# Altium PCB SoilMoistureSensor.PcbDoc
Units mm, origin at the board's own origin, x right, y up, seen from the top; angles counter-clockwise.
Board outline 58 x 58 mm, 2 copper layers (Top Layer, Bottom Layer); 32 components, 26 nets, 143 pads, 25 vias.
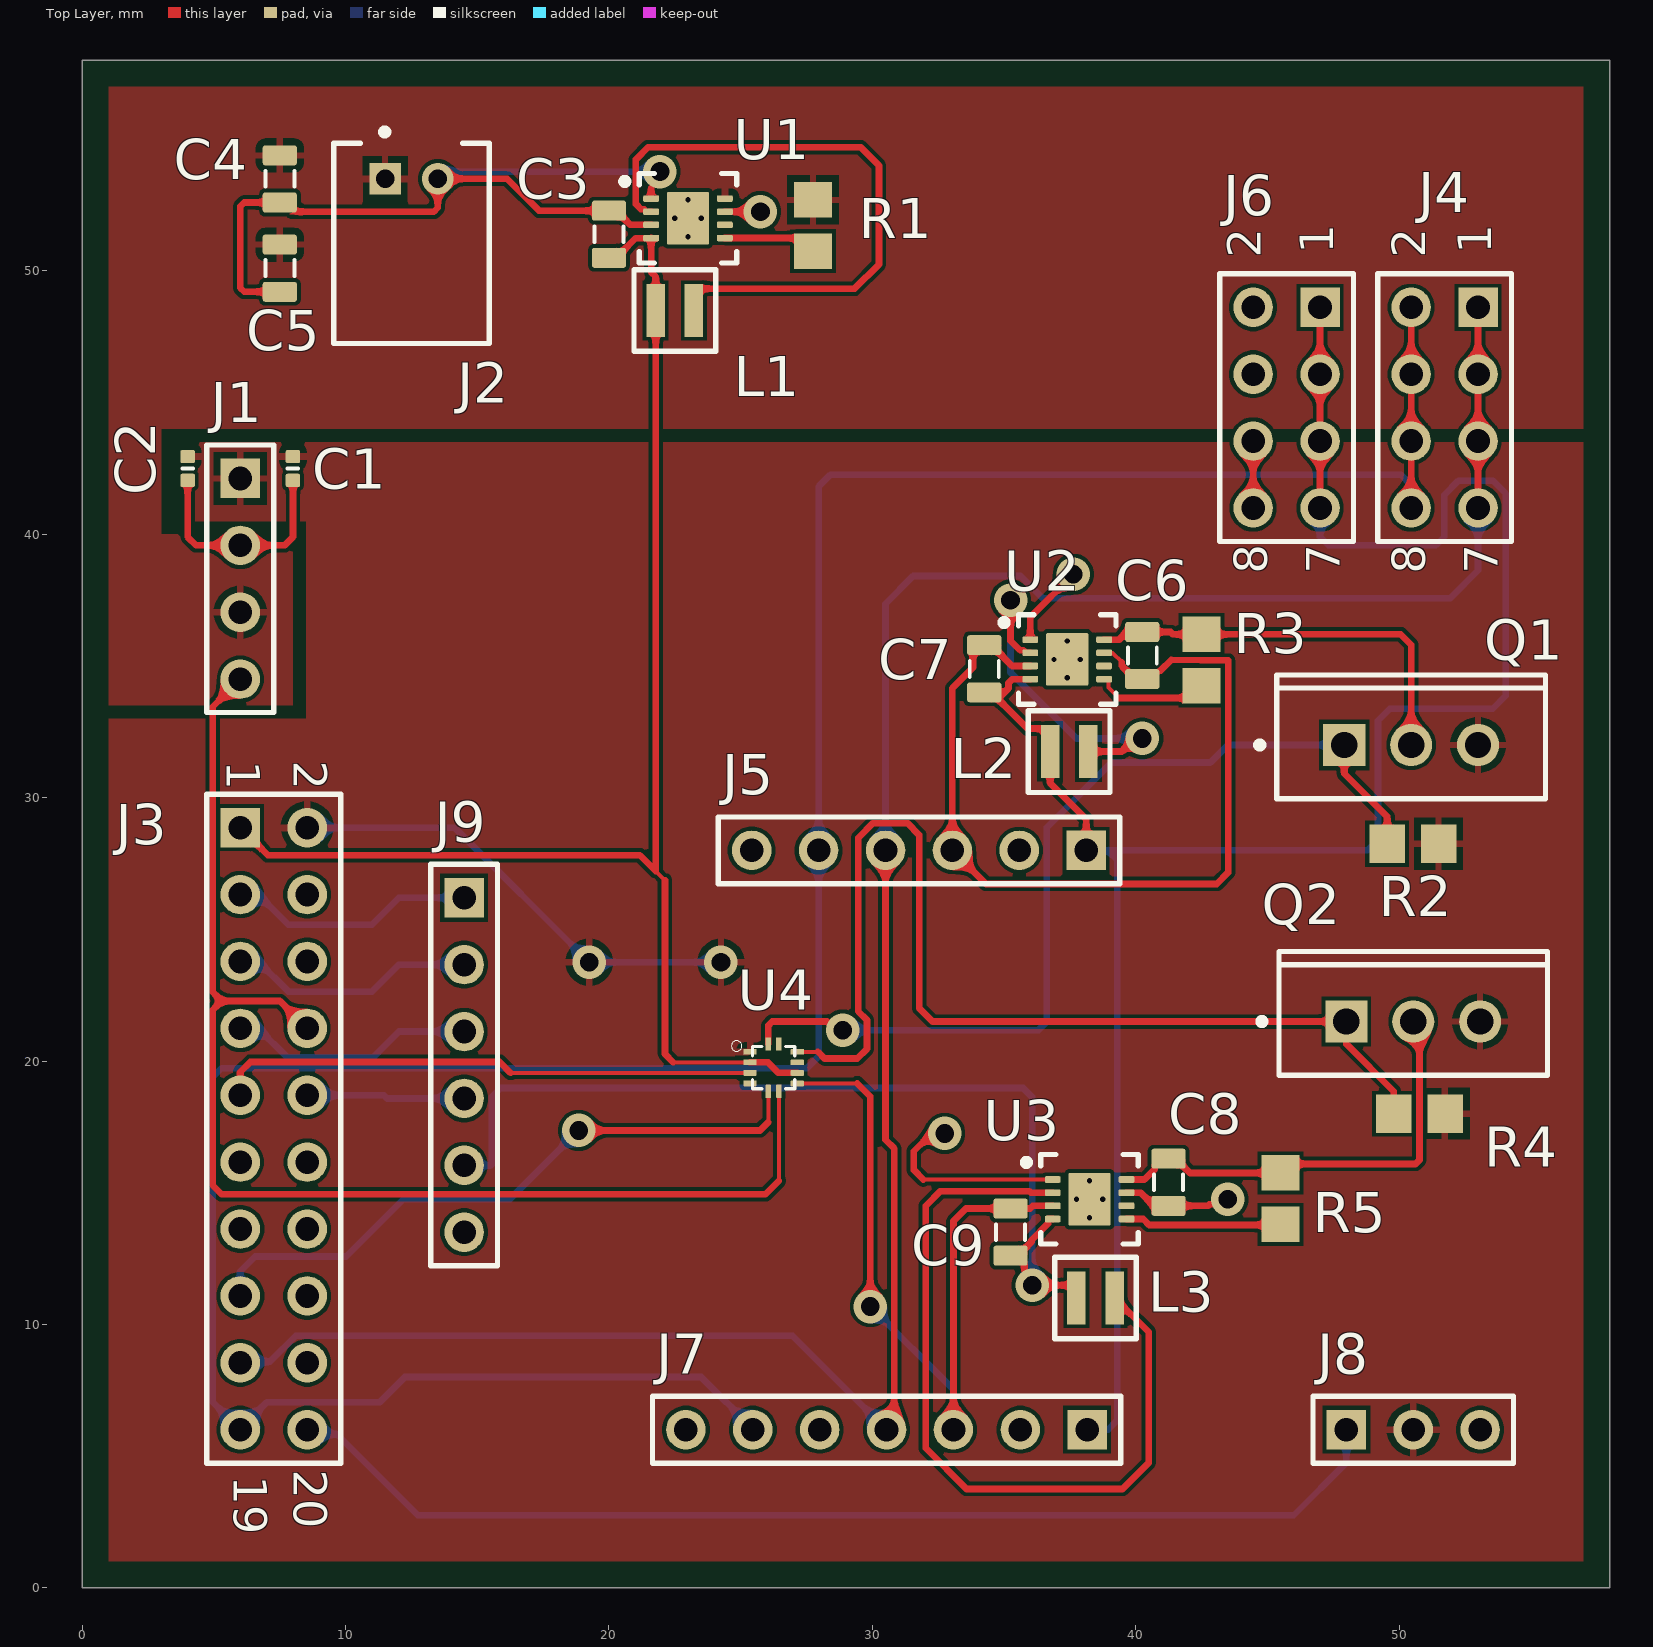
[diagram p0: Top Layer view]
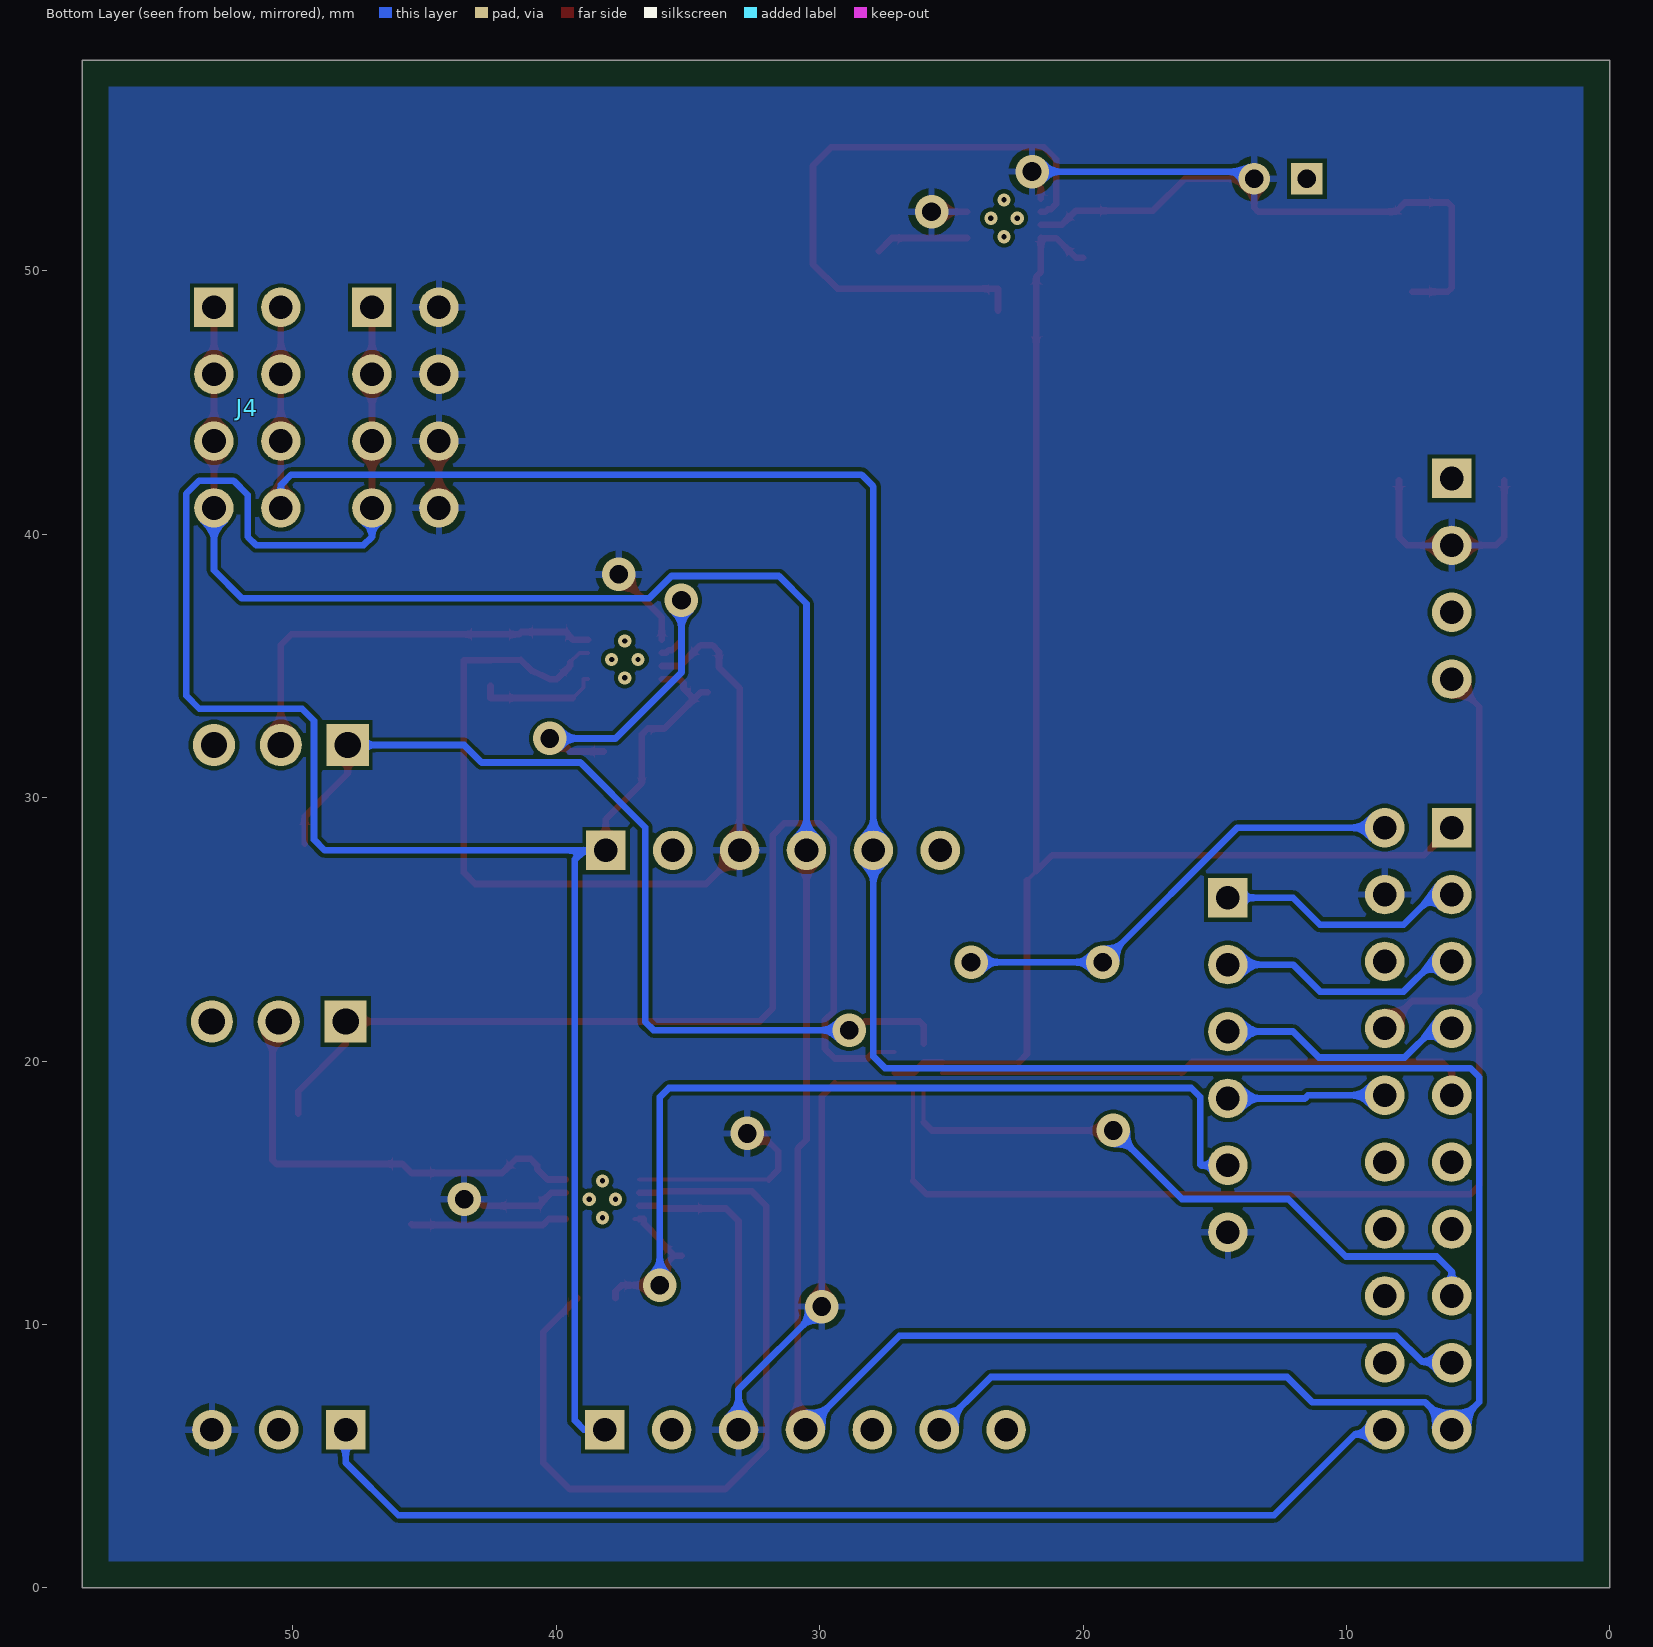
[diagram p1: Bottom Layer view, seen from below]
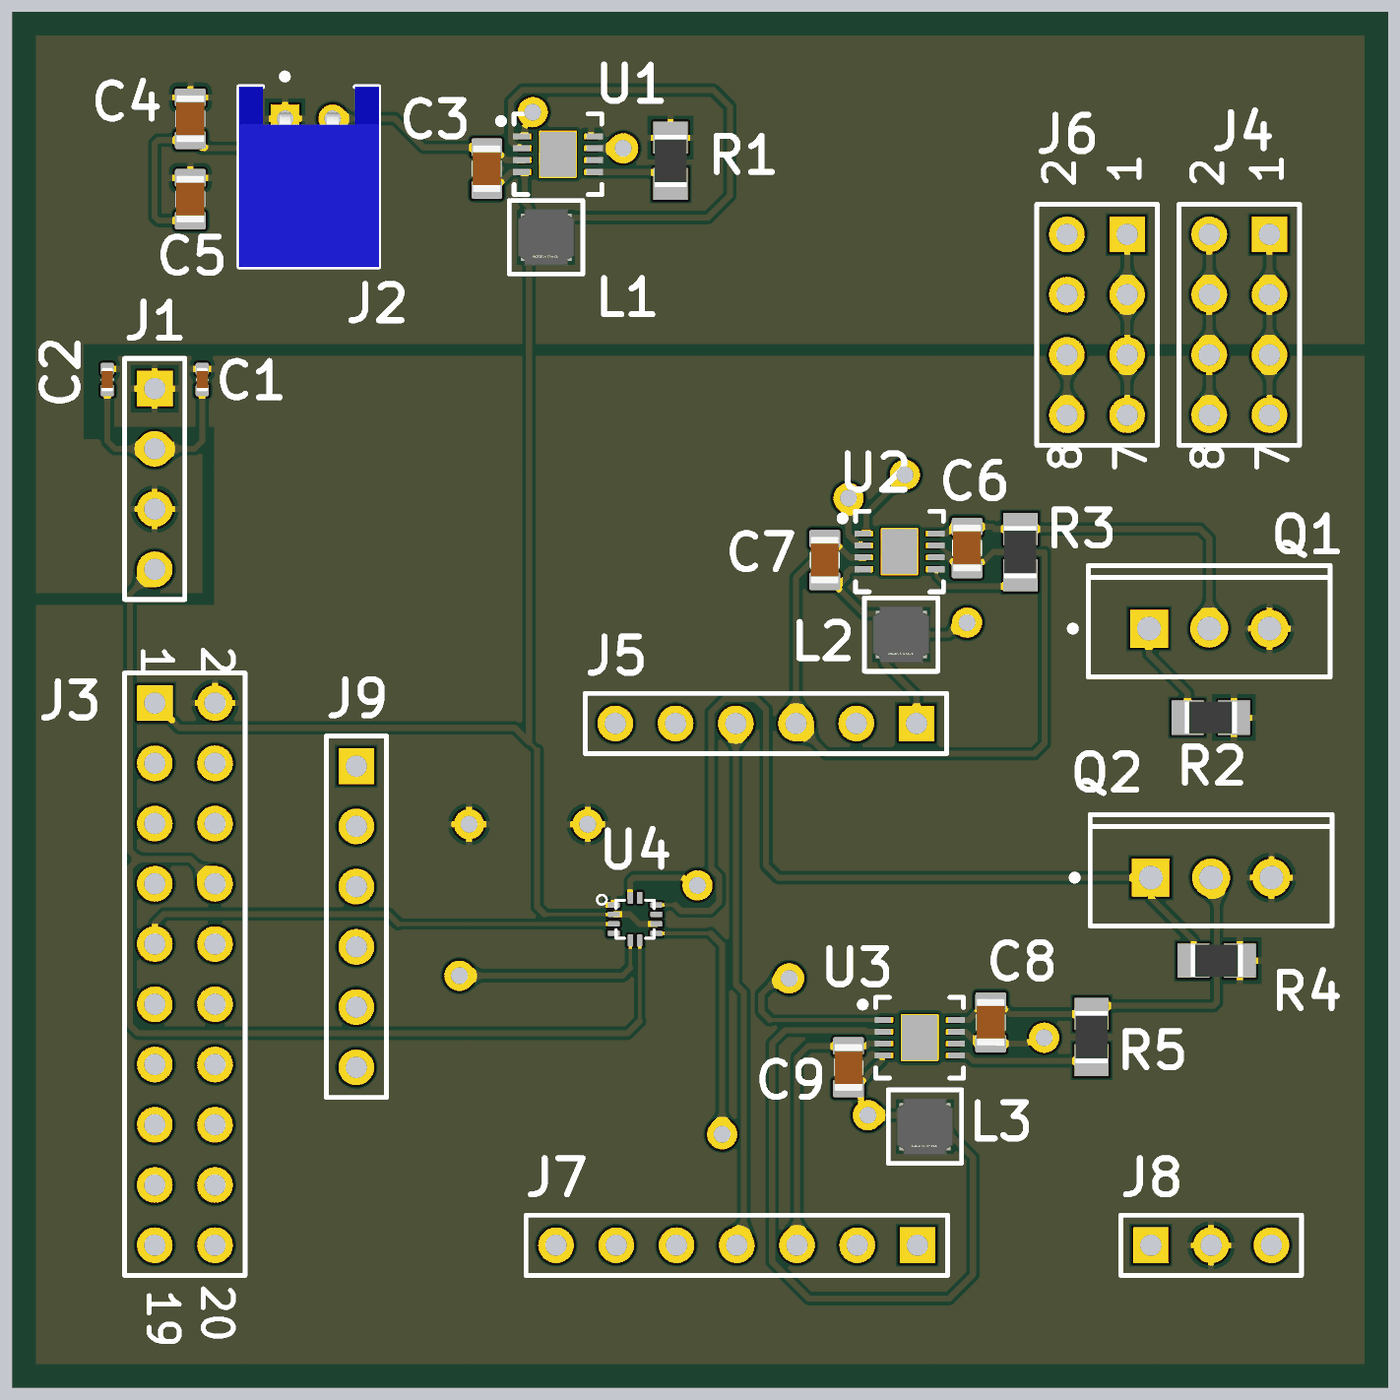
[diagram p2: 3D render of the assembled board from above, using the file's embedded part models]

## Layer stack, top to bottom
Top Solder: solder mask 0.0102, Solder Resist, Dk 3.5
Top Layer: signal copper 0.0356
Dielectric 1: dielectric 0.32, FR-4, Dk 4.8
Bottom Layer: signal copper 0.0356
Bottom Solder: solder mask 0.0102, Solder Resist, Dk 3.5

## Board outline
0,0 0,58 58,58 58,0

## Design rules (kind name [scope] priority, off if disabled: settings)
Clearance [All] p1: gap=0.152 ignorepadtopadclearanceinfootprint=FALSE
MinimumAnnularRing [All] p1: minimumring=0.127
MinimumSolderMaskSliver [All] p1: minsoldermaskwidth=0.11
PolygonConnect [All] p1: connectstyle=Relief reliefconductorwidth=0.254 reliefentries=4 polygonreliefangle="90 Angle" airgapwidth=0.254
RoutingVias [All] p1: holewidth=0.711 width=1.27 viastyle="Through Hole" minholewidth=0.711 minwidth=1.27 maxholewidth=0.711 maxwidth=1.27
SilkToSilkClearance [All] p1: silktosilkclearance=0.125
SilkToSolderMaskClearance [IsPad] p1: minsilkscreentomaskgap=0.01 clearancetoexposedcopper=TRUE
SolderMaskExpansion [All] p1: expansion=0.102 istentingtop=FALSE
Width [All] p1: maxlimit=0.254 minlimit=0.152 preferedwidth=0.254
27 further rules are at their usual default settings.

## Components (designator, comment, footprint, x,y, rotation, side; value= is the part's Value field where it differs from the comment)
C1 "Capacitor 2,2µF +/-20% 10V 0402" CAPC0402(1005)60_L 8,42.5 r270 top value=2.2µF
C2 "Capacitor 2,2µF +/-20% 10V 0402" CAPC0402(1005)60_L 4,42.5 r270 top value=2.2µF
C3 "Capacitor 22µF +/-40% 16V 0805" CAPC0805(2012)145_L 20,51.39 r270 top value=22µF
C4 "Capacitor 10µF +/-20% 25V 0805" CAPC0805(2012)145_L 7.5,53.5 r90 top value=10µF
C5 "Capacitor 10µF +/-20% 25V 0805" CAPC0805(2012)145_L 7.5,50.11 r90 top value=10µF
C6 "Capacitor 10µF +/-20% 25V 0805" CAPC0805(2012)145_L 40.25,35.4 r90 top value=10µF
C7 "Capacitor 22µF +/-40% 16V 0805" CAPC0805(2012)145_L 34.25,34.89 r270 top value=22µF
C8 "Capacitor 10µF +/-20% 25V 0805" CAPC0805(2012)145_L 41.25,15.4 r90 top value=10µF
C9 "Capacitor 22µF +/-40% 16V 0805" CAPC0805(2012)145_L 35.25,13.5 r270 top value=22µF
J1 "S7V8A" HDR1X4 6,42.12 r270 top
J2 "Battery Connector" JST-S2B-PH-K-S_V 12.5,51.05 r0 top
J3 "MSP_CONNECTOR_LEFT" HDR2X10 6,28.86 r270 top
J4 "SEESAW_I2C" HDR2X4#1 53,48.62 r270 bottom
J5 "SCD30_BUS" HDR1X6 38.12,28 r180 top
J6 "SEESAW_POWER" HDR2X4#2 47,48.62 r270 top
J7 "DPS310_BUS" HDR1X7 38.16,6 r180 top
J8 "SERVO_BUS" HDR1X3 48,6 r0 top
J9 "LORA_BUS" HDR1X6 14.5,26.2 r270 top
L1 "2.2uH" FP-NRH2412-MFG 22.5,48.5 r180 top
L2 "2.2uH" FP-NRH2412-MFG 37.475,31.75 r180 top
L3 "2.2uH" FP-NRH2412-MFG 38.475,11 r180 top
Q1 "FQP27P06" FAIR-TO-220-3 50.46,32 r90 top
Q2 "FQP27P06" FAIR-TO-220-3 50.54,21.5 r90 top
R1 "Resistor 100k +/-1% 0805 125 mW" RESC2013X70X40ML20T20 27.75,51.725 r270 top value=100k
R2 "Resistor 100k +/-1% 0805 125 mW" RESC2013X70X40ML20T20 50.525,28.25 r0 top value=100k
R3 "Resistor 100k +/-1% 0805 125 mW" RESC2013X70X40ML20T20 42.5,35.225 r270 top value=100k
R4 "Resistor 100k +/-1% 0805 125 mW" RESC2013X70X40ML20T20 50.775,18 r0 top value=100k
R5 "Resistor 100k +/-1% 0805 125 mW" RESC2013X70X40ML20T20 45.5,14.775 r270 top value=100k
U1 "LM3676SD-3.3/NOPB" NGQ0008A_V 23,52 r0 top
U2 "LM3676SD-3.3/NOPB" NGQ0008A_V 37.4,35.25 r0 top
U3 "LM3676SD-3.3/NOPB" NGQ0008A_V 38.25,14.75 r0 top
U4 "FXMA2104UMX" QFN40P160X160X50-12N 26.25,19.75 r0 top

## Footprints (in the part's own frame and the unit in brackets; to place one, negate y for a bottom-side part, rotate by r counter-clockwise, add the part's x,y. Pads: shape width x height; smd on the part's side, far side on the other; paste and mask are expansions set on the pad)
CAPC0402(1005)60_L [mm] "Chip Capacitor, Body 1.0x0.5mm, Height 0.6mm, IPC High Density"
  rrect25% 0.5x0.55 smd: 1(-0.45,0) 2(0.45,0)
  silkscreen extent 0,-0.2 0,0.2, body extent -0.5,-0.25 0.5,0.25, height 0.6
CAPC0805(2012)145_L [mm] "Chip Capacitor, Body 2.0x1.2mm, Height 1.45mm, IPC High Density"
  rrect25% 0.76x1.3 smd: 1(-0.9,0) 2(0.89,0)
  silkscreen extent -0.3,-0.55 0.3,0.55, body extent -1,-0.6 1,0.6, height 1.45
FAIR-TO-220-3 [mm] "FM, 3-Leads, Body 10.2x4.7mm, Pitch 2.54mm"
  rect 1.6x1.6 hole 1: 1(0,2.54)
  round 1.6 hole 1: 2(0,0) 3(0,-2.54)
  silkscreen extent -2.04,-5.1 2.66,5.87, body extent -2.04,-5.1 2.66,5.1, height 18.95
FP-NRH2412-MFG [mm]
  rect 0.7x2 smd paste+0 mask+0: 1(-0.725,0) 2(0.725,0)
  silkscreen extent -1.55,-1.55 1.55,1.55, body extent -1.35,-1.35 1.35,1.35, height 0.25
HDR1X3 [mm] "Connector; Header; 3 Position"
  rect 1.5x1.5 hole 0.9: 1(0,0)
  round 1.5 hole 0.9: 2(2.54,0) 3(5.08,0)
  silkscreen extent -1.27,-1.27 6.35,1.27
HDR1X4 [mm] "Connector; Header; 4 Position"
  rect 1.5x1.5 hole 0.9: 1(0,0)
  round 1.5 hole 0.9: 2(2.54,0) 3(5.08,0) 4(7.62,0)
  silkscreen extent -1.27,-1.27 8.89,1.27
HDR1X6 [mm] "Connector; Header; 6 Position"
  rect 1.5x1.5 hole 0.9: 1(0,0)
  round 1.5 hole 0.9: 2(2.54,0) 3(5.08,0) 4(7.62,0) 5(10.16,0) 6(12.7,0)
  silkscreen extent -1.27,-1.27 13.97,1.27
HDR1X7 [mm] "Connector; Header; 7 Position"
  rect 1.5x1.5 hole 0.9: 1(0,0)
  round 1.5 hole 0.9: 2(2.54,0) 3(5.08,0) 4(7.62,0) 5(10.16,0) 6(12.7,0) 7(15.24,0)
  silkscreen extent -1.27,-1.27 16.51,1.27
HDR2X4#1 [mm] "Connector; Header; 4x2 Position"
  rect 1.5x1.5 hole 0.9: 1(0,0)
  round 1.5 hole 0.9: 2(0,2.54) 3(2.54,0) 4(2.54,2.54) 5(5.08,0) 6(5.08,2.54) 7(7.62,0) 8(7.62,2.54)
HDR2X4#2 [mm] "Connector; Header; 4x2 Position"
  rect 1.5x1.5 hole 0.9: 1(0,0)
  round 1.5 hole 0.9: 2(0,-2.54) 3(2.54,0) 4(2.54,-2.54) 5(5.08,0) 6(5.08,-2.54) 7(7.62,0) 8(7.62,-2.54)
  silkscreen extent -1.27,-3.81 8.89,1.27
HDR2X10 [mm] "Connector; Header; 10x2 Position"
  rect 1.5x1.5 hole 0.9: 1(0,0)
  round 1.5 hole 0.9: 2(0,2.54) 3(2.54,0) 4(2.54,2.54) 5(5.08,0) 6(5.08,2.54) 7(7.62,0) 8(7.62,2.54) 9(10.16,0) 10(10.16,2.54) 11(12.7,0) 12(12.7,2.54) 13(15.24,0) 14(15.24,2.54) 15(17.78,0) 16(17.78,2.54) 17(20.32,0) 18(20.32,2.54) 19(22.86,0) 20(22.86,2.54)
  silkscreen extent -1.27,-1.27 24.13,3.81
JST-S2B-PH-K-S_V [mm] "THD, 2-Leads, Body 7.6x5.9mm, Pitch 2mm"
  rect 1.2x1.2 hole 0.7: 1(-1,2.45)
  round 1.2 hole 0.7: 2(1,2.45)
  silkscreen extent -2.95,-3.8 2.95,4.35, body extent -2.95,-3.8 2.95,3.8, height 4.8
NGQ0008A_V [mm] "SON, 8-Leads, Body 3x3mm, Pitch 0.5mm, NSC Recommended"
  rrect40% 0.6x0.25 smd paste-0.125 mask+0.051: 1(-1.4,0.75) 2(-1.4,0.25) 3(-1.4,-0.25) 4(-1.4,-0.75) 5(1.4,-0.75) 6(1.4,-0.25) 7(1.4,0.25) 8(1.4,0.75)
  rrect6% 1.6x2 smd paste-0.05 mask+0.051: 9(0,0)
  silkscreen extent -2.52,-1.7 1.85,1.7, body extent -1.55,-1.55 1.55,1.55, height 0.8
QFN40P160X160X50-12N [mm]
  rrect25% 0.5x0.22 smd: 1(-0.9,0.6) 2(-0.9,0.2) 3(-0.9,-0.2) 4(-0.9,-0.6) 7(0.9,-0.6) 8(0.9,-0.2) 9(0.9,0.2) 10(0.9,0.6)
  rrect25% 0.22x0.5 smd: 5(-0.2,-0.9) 6(0.2,-0.9) 11(0.2,0.9) 12(-0.2,0.9)
  silkscreen extent -1.6,-0.8 0.8,1.02
RESC2013X70X40ML20T20 [mm] "Chip Resistor, 2-Leads, Body 2.2x1.35mm, IPC Low Density"
  rect 1.35x1.45 smd: 1(-0.975,0) 2(0.975,0)
  body extent -1.1,-0.67 1.1,0.67, height 0.7

## Part data
C1 C2: library part CMP-001-00056-4, "Chip Capacitor, 2,2µF +/-20%, 10V, 0402, Thickness 0.6 mm", Case/Package=0402, Max Operating Temperature=85°C, Min Operating Temperature=-55°C, Tolerance=10%, Voltage Rating=10V, Mounting Technology=SMT, Pins=2
C3 C7 C9: library part CMP-001-00081-4, "Chip Capacitor, 22µF +/-40%, 16V, 0805, Thickness 1.45 mm", Case/Package=0805, Max Operating Temperature=85°C, Min Operating Temperature=-55°C, Tolerance=5%, Voltage Rating=16V, Mounting Technology=SMT, Pins=2
C4 C5 C6 C8: library part CMP-001-00079-4, "Chip Capacitor, 10µF +/-20%, 25V, 0805, Thickness 1.45 mm", Case/Package=0805, Max Operating Temperature=85°C, Min Operating Temperature=-55°C, Tolerance=10%, Voltage Rating=25V, Mounting Technology=SMT, Pins=2
J1: library part "Header 4", "Header, 4-Pin", LatestRevisionDate=17-Jul-2002, LatestRevisionNote="Re-released for DXP Platform.", Publisher="Altium Limited"
J2: library part CMP-002-00030-2, "Male Header, Pitch 2 mm, 1 x 2 Position, Height 4.8 mm, Tail Length 3.4 mm, -25 to 85 degC, RoHS, Bulk", Case/Package=S2B-PH-K-S, Manufacturer="Japan Solderless Terminals", Max Operating Temperature=85°C, Min Operating Temperature=-25°C, Package Description="Male Header, Pitch 2 mm, 1 x 2 Position, Height 4.8 mm, Tail Length 3.4 mm", Connector Type=Header, Datasheet URL=http://www.jst-mfg.com/product/pdf/eng/ePH.pdf, Datasheet Version=Dec-12, Gender=Male, Mounting Technology=SM, Package Reference=S2B-PH-K-S, RoHS Compliant=Unknown
J3: library part "Header 10X2", "Header, 10-Pin, Dual row", LatestRevisionDate=17-Jul-2002, LatestRevisionNote="Re-released for DXP Platform.", Publisher="Altium Limited"
J4 J6: library part "Header 4X2", "Header, 4-Pin, Dual row", LatestRevisionDate=17-Jul-2002, LatestRevisionNote="Re-released for DXP Platform.", Publisher="Altium Limited"
J5 J9: library part "Header 6", "Header, 6-Pin", LatestRevisionDate=17-Jul-2002, LatestRevisionNote="Re-released for DXP Platform.", Publisher="Altium Limited"
J7: library part "Header 7", "Header, 7-Pin", LatestRevisionDate=17-Jul-2002, LatestRevisionNote="Re-released for DXP Platform.", Publisher="Altium Limited"
J8: library part "Header 3", "Header, 3-Pin", LatestRevisionDate=17-Jul-2002, LatestRevisionNote="Re-released for DXP Platform.", Publisher="Altium Limited"
L1 L2 L3: library part CMP-14484-000657-1, "Shielded Wirewound Inductor 2.2uH 20% 1.19A 0.168Ω SMD", Case/Package=Nonstandard, Current Rating=1A, DC Resistance (DCR)=140mR, Max DC Current=1.7A, Max Operating Temperature=120°C, Min Operating Temperature=-25°C, Package Quantity=2500, Self Resonant Frequency=72MHz, Test Frequency=100kHz, Tolerance=20%, Core Material=Ferrite, Halogen Free="Halogen Free", Height=1.2mm, Height - Seated (Max)=0.047inch, Inductance=2.2uH, Length=0.095inch, Mount="Surface Mount", Packaging="Tape and Reel", RoHS Compliant=Yes, Saturation Current=1.7A, Shielding=Shielded, Termination=SMD/SMT, Width=0.095inch
Q1 Q2: library part CMP-2000-04936-1, "P-Channel QFET(R) MOSFET, -60 V, -27 A, -55 to 175 degC, 3-Pin TO-220, RoHS, Tube", Drain-Source On Resistance-Max=0.07O, Drain-to-Source Voltage [Vdss]=60V, Manufacturer=Fairchild, Package Description="3-Pin Through Hole Device, Body 10 x 4.5 mm, Pitch 2.54 mm", Package Reference=TO-220, Rated Power Dissipation=120W, Channel Type=P-Channel, Datasheet URL=https://www.fairchildsemi.com/datasheets/FQ/FQP27P06.pdf, Datasheet Version=Mar-13, Manufacturer URL=https://www.fairchildsemi.com/, Package URL=https://www.fairchildsemi.com/package-drawings/TO/TO220B03.pdf, Qg Gate Charge=33nC
R1 R2 R3 R4 R5: library part CMP-009-00024-5, "Chip Resistor, 100 KOhm, +/- 1%, 0.125 W, -55 to 155 degC, 0805 (2012 Metric)", Case/Package=0805, Max Operating Temperature=155°C, Min Operating Temperature=-55°C, Power=125mW, Tolerance=1%, Voltage Rating=150V, Mounting Technology=SM, Pins=2, RoHS Compliant=True
U1 U2 U3: library part CMP-0063-00744-3, "2MHz, 600mA Step-Down DC-DC Converter with Mode Control, 8-pin LLP, Pb-Free", Manufacturer="Texas Instruments", PackageTopMarking=ZXYTT*S010B, PowerWise=N, ComponentLink1Description="Datasheet URL", ComponentLink1URL=http://www.ti.com/general/docs/lit/getliterature.tsp?genericPartNumber=LM3676&fileType=pdf, CompType=MiscPower, PackageDescription="LLP, Plastic, Dual, 3 x 3 x 0.8mm Body, 8 Lead, 0.5mm Pitch, No Pullback", PackageReference=NGQ0008A, PinCount=8, RoHS=Y

## Via types
v1: diameter 1.27, hole 0.711, Top Layer to Bottom Layer, 13 vias
v2: diameter 0.5, hole 0.2, Top Layer to Bottom Layer, 12 vias

## Nets (pads, with @x,y where several pads share a name; then routed paths per layer and width w, separated by ;. In a path a pad name is that pad's centre, name@x,y a point inside that pad or via, vN(x,y) a via of type N, cw(c..) or ccw(c..) an arc to the next point about the centre after c; other vN are vias at no path point)
3V3: C3.2 J3.1 L1.2 U1.4 U4.2 U4.8 | length 54.9
  Top Layer w0.154: 21.775,27.212 22.125,26.862 ; 22.443,19.95 U4.2
  Top Layer w0.254: J3.1 7.045,27.815 21.173,27.815 21.775,27.212 L1.2 21.775,49.786 21.6,49.961 U1.4 21.598,51.248 21.018,51.248 20.27,50.5 C3.2 ; 22.125,26.862 22.125,20.267 22.443,19.95 ; U4.2 26.037,19.95 26.437,19.55 U4.8
5V: C1.1 C2.1 J1.1 J3.2 J8.2 Q1.3 Q2.3 R2.2 R4.2 U4.1 | length 17.8
  Bottom Layer w0.254: J3.2 14.14,28.86 v1(19.25,23.75) v1(24.25,23.75)
CS: J3.10 J9.4 | length 6
  Bottom Layer w0.254: J3.10 11.457,18.7 11.577,18.58 J9.4
GND: C1.2 C2.2 C3.1 C4.1 C5.1 C6.1 C7.1 C8.1 C9.1 J1.2 J2.2 J3.4 J5.3 J6.2 J6.4 J6.6 J6.8 J7.3 J8.3 J9.6 U1.1 U1.3 U1.7 U2.1 U2.3 U2.7 U3.1 U3.3 U3.7 U4.7 | length 122.9
  Top Layer w0.154: U4.7 29.428,19.15 ; 31.934,15.5 U3.1 ; U2.7 39.116,35.5 39.473,35.143
  Top Layer w0.25: 4,39.905 C2.2 ; 8,39.905 C1.2
  Top Layer w0.254: 4,39.905 4.325,39.58 J1.2 7.675,39.58 8,39.905 ; C5.1 6.149,49.21 6,49.359 6,52.451 6.149,52.6 7.77,52.6 8.12,52.25 13.351,52.25 13.5,52.399 J2.2 16.131,53.5 17.341,52.29 C3.1 20.27,52.29 20.81,51.75 U1.3 ; U1.1 21.6,53.163 ; U1.7 v1(25.75,52.25) ; 29.428,19.15 29.923,18.655 v1(29.923,10.677) ; 31.934,15.5 31.577,15.857 31.574,15.857 31.574,16.574 32.25,17.25 v1(32.75,17.25) ; J7.3 33.08,13.925 33.555,14.4 C9.1 35.993,14.4 36.093,14.5 U3.3 ; U2.3 35.31,35 34.52,35.79 C7.1 34.075,35.79 33.822,35.537 33.822,34.941 33.04,34.159 J5.3 34.318,26.722 43.08,26.722 43.512,27.154 43.512,35.206 41.353,35.231 40.946,34.825 C6.1 39.98,34.5 39.473,35.007 39.473,35.143 ; U2.1 36,36.853 v1(37.63,38.483) ; U3.7 40.184,15 40.684,14.5 C8.1 42.75,14.5 42.806,14.556 43.306,14.556 v1(43.5,14.75) ; J6.8 J6.6
  Bottom Layer w0.254: J2.2 13.5,53.773 v1(21.935,53.773) ; v1(29.923,10.677) 33.08,7.52 J7.3
LORA_5V_EN: Q2.1 R4.1 U4.10 | length 41
  Top Layer w0.154: U4.10 27.932,20.35
  Top Layer w0.254: 27.932,20.35 28.187,20.095 29.428,20.095 29.796,20.463 29.796,21.556 29.466,21.886 29.466,28.475 30.024,29.034 31.333,29.034 31.777,28.589 31.777,22.008 32.285,21.5 Q2.1 48,20.648 49.8,18.848 R4.1
LORA_GPIO_EN: J3.15 U4.5 | length 24.5
  Top Layer w0.154: 26.05,17.68 U4.5
  Top Layer w0.254: v1(18.848,17.363) 25.733,17.363 26.05,17.68
  Bottom Layer w0.254: J3.15 6,12.007 6.568,12.575 10.022,12.575 12.206,14.759 16.245,14.759 v1(18.848,17.363)
LORA_V_IN: C9.2 J9.5 L3.2 U3.4 | length 37.5
  Top Layer w0.154: U3.4 U3.4@37.035,14
  Top Layer w0.254: C9.2 C9.2@35.52,12.61 ; U3.4 36.679,14 36.677,13.998 36.677,13.827 36.044,13.194 36.044,13.134 C9.2@35.52,12.61 ; L3.2 37.75,11.259 37.527,11.482 v1(36.07,11.482) 36.07,11.757 35.773,12.054 35.773,12.357 C9.2@35.52,12.61
  Bottom Layer w0.254: J9.5 15.521,16.04 15.546,16.065 15.546,18.633 15.889,18.975 35.727,18.975 36.07,18.633 v1(36.07,11.482)
MISO: J3.5 J9.2 | length 9.4
  Bottom Layer w0.254: J3.5 6.682,23.78 7.829,22.633 11,22.633 12.027,23.66 J9.2
MOSI: J3.7 J9.3 | length 9.4
  Bottom Layer w0.254: J3.7 6.682,21.24 7.786,20.136 11.043,20.136 12.027,21.12 J9.3
NetC6_2: C6.2 Q1.2 R3.1 U2.8 | length 15.8
  Top Layer w0.254: U2.8 39.372,36 39.662,36.29 C6.2 41.327,36.29 41.417,36.2 R3.1 50.065,36.2 50.46,35.805 Q1.2
NetC8_2: C8.2 Q2.2 R5.1 U3.8 | length 17.5
  Top Layer w0.254: U3.8 40.331,15.5 40.727,15.896 40.727,16.037 40.98,16.29 C8.2 41.52,16.29 42.06,15.75 R5.1 45.843,16.093 50.627,16.093 50.776,16.241 50.776,21.5 Q2.2
NetL1_1: L1.1 U1.2 | length 24.1
  Top Layer w0.254: U1.2 21.429,52.25 21.333,52.346 21.214,52.346 21.021,52.539 21.021,54.232 21.49,54.702 29.548,54.702 30.25,54 30.25,50.25 29.328,49.328 23.225,49.328 L1.1
NetL2_1: L2.1 U2.2 | length 13.5
  Top Layer w0.254: v1(35.25,37.5) 35.25,35.959 35.614,35.596 35.733,35.596 35.829,35.5 U2.2 ; L2.1 39.475,31.75 39.975,32.25 v1(40.25,32.25)
  Bottom Layer w0.254: v1(35.25,37.5) 35.25,34.75 37.75,32.25 v1(40.25,32.25)
NetL3_1: L3.1 U3.2 | length 30.6
  Top Layer w0.254: U3.2 36.019,15 35.96,15.059 32.585,15.059 32.031,14.505 32.031,5.298 33.579,3.75 39.5,3.75 40.5,4.75 40.5,9.7 L3.1
NetR1_2: R1.2 U1.5 | length 3.6
  Top Layer w0.254: U1.5 27.25,51.25 R1.2
NetR3_2: R3.2 U2.5 | length 4.6
  Top Layer w0.154: U2.5 38.965,34.5 38.965,34.19 39.372,33.784
  Top Layer w0.254: 39.372,33.784 42.5,33.784 R3.2
NetR5_2: R5.2 U3.5 | length 6
  Top Layer w0.254: U3.5 40.286,14 40.511,13.775 45.475,13.775 R5.2
SCL: J3.17 J4.1 J4.3 J4.5 J4.7 J5.4 J7.4 | length 92
  Top Layer w0.254: J5.4 30.5,17.009 30.837,16.672 30.837,6 J7.4 ; J4.7 J4.5 J4.3 J4.1
  Bottom Layer w0.254: J3.17 6.047,8.587 7.131,8.587 8.114,9.569 26.971,9.569 J7.4 ; J5.4 30.5,37.365 31.549,38.414 35.629,38.414 36.474,37.569 51.934,37.569 53,38.635 J4.7
SCLK: J3.3 J9.1 | length 9.4
  Bottom Layer w0.254: J3.3 6.682,26.32 7.829,25.173 11,25.173 12.027,26.2 J9.1
SDA: J3.19 J4.2 J4.4 J4.6 J4.8 J5.5 J7.6 | length 111.3
  Top Layer w0.254: J4.8 J4.6 J4.4 J4.2
  Bottom Layer w0.254: J7.6 25.46,6.04 23.5,8 12.25,8 11.287,7.037 7,7.037 6,6.037 J3.19 4.955,7.045 4.955,19.387 5.298,19.729 27.523,19.729 27.96,20.167 J5.5 27.96,41.81 28.417,42.267 50.065,42.267 50.46,41.872 J4.8
SENSORS_5V_EN: Q1.1 R2.1 U4.12 | length 36
  Top Layer w0.254: U4.12 26.05,21.351 26.199,21.5 28.279,21.5 28.606,21.173 v1(28.881,21.173) ; Q1.1 47.92,30.918 49.55,29.288 R2.1
  Bottom Layer w0.254: v1(28.881,21.173) 36.311,21.173 36.628,21.49 36.628,28.878 39.086,31.336 42.834,31.336 43.499,32 Q1.1
SENSORS_GPIO_EN: J3.9 U4.3 | length 20.6
  Top Layer w0.154: 16.267,19.55 U4.3
  Top Layer w0.254: J3.9 6,19.585 6.381,19.966 15.851,19.966 16.267,19.55
SENSORS_V_IN: C7.2 J5.1 J6.1 J6.3 J6.5 J6.7 J7.1 L2.2 U2.4 | length 79.6
  Top Layer w0.154: U2.4@35.993,34.5 U2.4
  Top Layer w0.254: C7.2 34.52,34 C7.2@34.77,33.75 ; U2.4@35.993,34.5 35.319,34.5 35.17,34.351 35.17,34.15 C7.2@34.77,33.75 ; J5.1 38.12,29.186 36.75,30.556 L2.2 36.75,32.4 36.527,32.623 35.897,32.623 C7.2@34.77,33.75 ; J6.7 J6.5 J6.3 J6.1
  Bottom Layer w0.254: J5.1 38.953,28 ; J7.1 38.953,6 39.295,6.343 39.295,27.657 38.953,28 ; J6.7 47,39.905 47.317,39.588 51.399,39.588 51.716,39.905 51.716,41.493 52.262,42.039 53.558,42.039 54.053,41.543 54.053,33.873 53.558,33.377 49.659,33.377 49.201,32.92 49.201,28.406 48.795,28 38.953,28
SERVO_GPIO_EN: J1.4 J3.8 U4.6 | length 48.9
  Top Layer w0.154: 26.45,15.452 U4.6
  Top Layer w0.254: J1.4 4.955,33.455 4.955,22.62 5.298,22.277 ; J3.8 7.503,22.277 5.298,22.277 ; 26.45,15.452 25.935,14.937 5.298,14.937 4.955,15.28 4.955,21.935 5.298,22.277
SERVO_PWM: J3.20 J8.1 | length 42.9
  Bottom Layer w0.254: J3.20 8.711,5.829 9.671,5.829 12.75,2.75 46,2.75 48,4.75 J8.1
VCC: C4.2 C5.2 J1.3 J2.1 R1.1 U1.8
pads on no net: J3.6 J3.11 J3.12 J3.13 J3.14 J3.16 J3.18 J5.2 J5.6 J7.2 J7.5 J7.7 U1.6 U1.9 U2.6 U2.9 U3.6 U3.9 U4.4 U4.9 U4.11
copper on no net:
  other v2: 38.25,14.05 37.75,14.75 38.75,14.75 38.25,15.45 37.4,34.55 36.9,35.25 37.9,35.25 37.4,35.95 23,51.3 22.5,52 23.5,52 23,52.7

## Polygon pours and split planes (outlines as drawn)
GND on Bottom Layer "GND_L02_P000" (solid, pour order 0): 1,57 1,1 57,1 57,57
5V on Top Layer "5V_L01_P001" (solid, pour order 1): 3.5,40.5 3.5,43.5 4.5,43.5 57,43.5 57,1 1,1 1,33 1.5,33 8.5,33 8.5,40.5
VCC on Top Layer "VCC_L01_P002" (solid, pour order 2): 1,33.5 8,33.5 8,40 3,40 3,44 57,44 57,57 1,57

## Silkscreen, mask and mechanical layers (free items; w line width, h text height)
Mechanical 1:
  the board outline again, w0.254

## Text inside footprints (layer, text, board x,y; h text height)
J3: Top Overlay "20" at 8.032,4.476 h1.27 r270; Top Overlay "19" at 5.75,4.25 h1.27 r270; Top Overlay "1" at 5.492,31.4 h1.27 r270; Top Overlay "2" at 8.032,31.4 h1.27 r270
J4: Top Overlay "2" at 51,50.5 h1.27 r90; Top Overlay "1" at 53.508,50.652 h1.27 r90; Top Overlay "7" at 53.75,38.5 h1.27 r90; Top Overlay "8" at 51,38.5 h1.27 r90
J6: Top Overlay "2" at 44.75,50.5 h1.27 r90; Top Overlay "1" at 47.508,50.652 h1.27 r90; Top Overlay "7" at 47.75,38.5 h1.27 r90; Top Overlay "8" at 45,38.5 h1.27 r90